# EAGLE board HackmodWear_hexagonSensor (EAGLE 9.1.0)
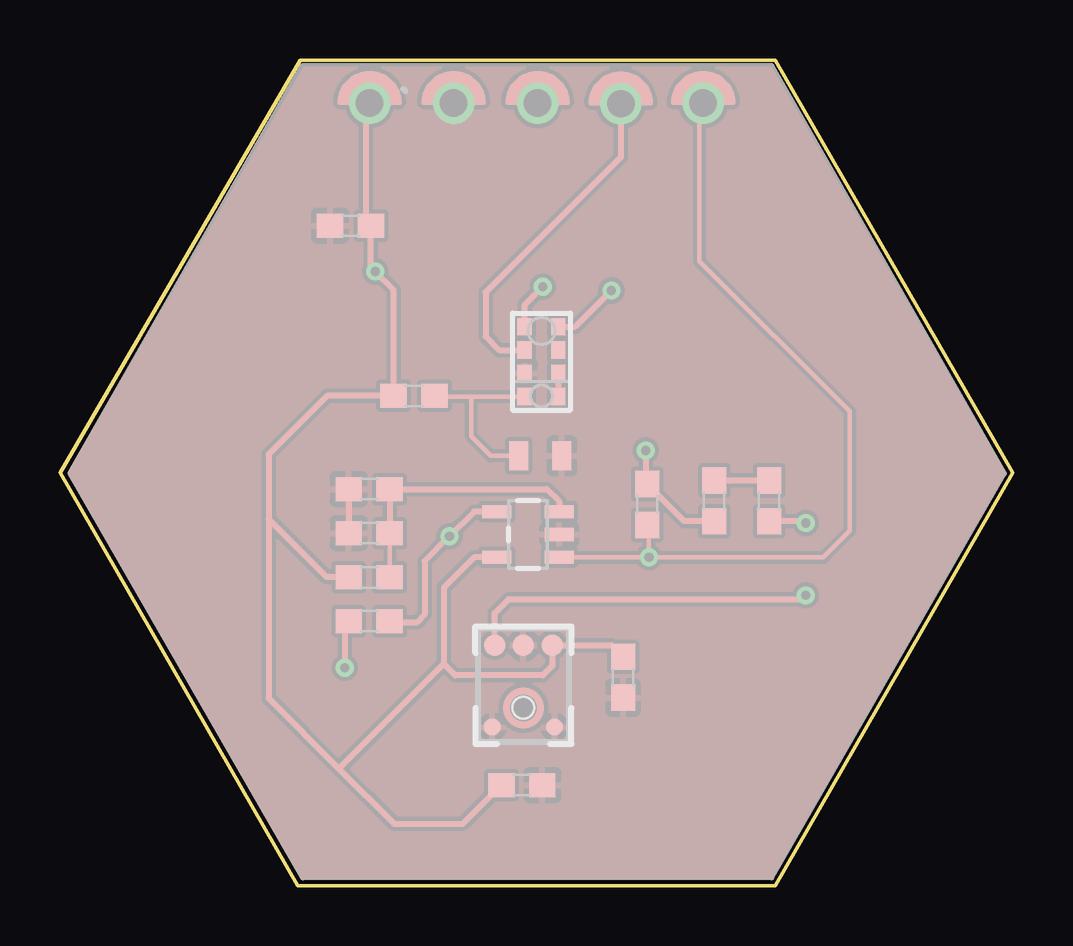
[diagram p0: board, top side]
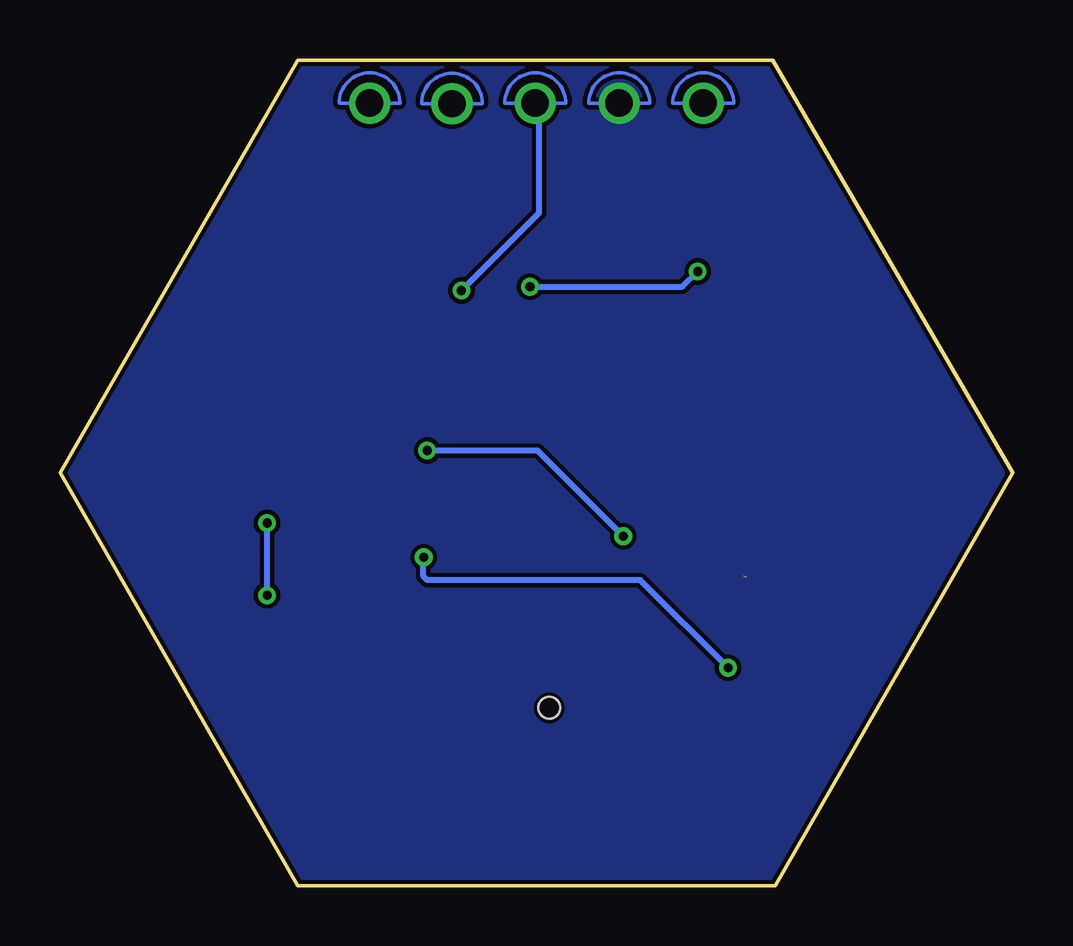
[diagram p1: board, bottom side, seen from below]

Size 39.7 x 34.4 mm. Coordinates in mm from the lower left corner, seen from the top.
Outline: 0,17.2 10,34.4 29.8,34.4 39.7,17.2 29.8,0 9.9,0 0,17.2
Copper layers (1*16): Top 0.035mm / dielectric 1.5mm / Bottom 0.035mm
Design rules "SparkFun-2-layer-TIGHT": minimum track width 7mil, minimum drill 15mil, track to track 7mil, track to pad 7mil, pad to pad 7mil, via to via 7mil, smd to smd 7mil, copper to edge 7mil, drill to drill 7mil, minimum pad ring 7mil, minimum via ring 7mil, stop-mask expansion 4mil, vias tented up to drill 25mil, thermal gap 10mil

## Footprints (pad centres in the part's own frame; a part is rotated, then mirrored left to right if it is on the bottom)
0603 = smd 1.1 x 1: 1 -0.85,0; 2 0.85,0
0805 = smd 0.8 x 1.2: 1 -0.9,0; 2 0.9,0
1X01 = drill 1.143: P$1 0,0
SOT23-5 = smd 0.55 x 1.2: 1 -0.95,-1.3; 2 0,-1.3; 3 0.95,-1.3; 4 0.95,1.3; 5 -0.95,1.3
ADMP401 = smd 0.9 x 0.9: 1 -1.2,2.62; 5 1.2,2.62; 6 0,2.62 | smd 0.7 x 0.7: 2 1.3,-0.8; 4 -1.3,-0.8 | hole 0.9: 0,0
APDS-9960 = smd 0.6 x 0.72: 1 0.7,1.455; 2 0.7,0.485; 3 0.7,-0.485; 4 0.7,-1.455; 5 -0.7,-1.455; 6 -0.7,-0.485; 7 -0.7,0.485; 8 -0.7,1.455

## Placement (x,y rotation side)
C8  0.1uF  [0603]  19.24,4.19 0 top
C13  10uF  [0805]  20.01,17.91 0 top
C15  1.0uF  [0603]  12.11,27.5 180 top
C17  100pF  [0603]  24.46,15.88 270 top
C18  0.1uF  [0603]  23.47,8.68 90 top
C19  4.7uF  [0603]  29.55,16.03 90 top
C20  1.0uF  [0603]  12.88,16.53 180 top
J15  [1X01]  23.37,32.58 0 top
J28  [1X01]  12.9,32.6 0 top
J29  [1X01]  16.4,32.6 0 top
J37  [1X01]  26.8,32.6 0 top
J39  [1X01]  19.9,32.6 0 top
R9  10k  [0603]  12.88,12.85 180 top
R11  10k  [0603]  12.88,14.69 0 top
R12  1.5k  [0603]  27.26,16.03 90 top
R13  100k  [0603]  12.88,11.01 0 top
R29  0  [0603]  14.75,20.41 180 top
U5  OPA344  [SOT23-5]  19.5,14.63 90 top
U6  ADMP401  [ADMP401]  19.31,7.4 0 top
U7  APDS-9960  [APDS-9960]  20.06,21.83 0 top

## Library data of the parts
C8 C18 = SparkFun-Capacitors; PROD_ID: CAP-00810
C13 = SparkFun-Capacitors; PROD_ID: CAP-11330
C15 C20 = SparkFun-Capacitors; PROD_ID: CAP-00868
C17 = SparkFun-Capacitors; PROD_ID: CAP-07883
C19 = SparkFun-Capacitors; PROD_ID: CAP-08280
J15 J28 J29 J37 J39 = SparkFun-Connectors
R9 R11 = SparkFun-Resistors; PROD_ID: RES-00824
R12 = SparkFun-Resistors; PROD_ID: RES-08306
R13 = SparkFun-Resistors; PROD_ID: RES-07828
R29 = SparkFun-Resistors; PROD_ID: RES-08609
U5 = SparkFun
U6 = SparkFun-Sensors; PROD_ID: IC-09773
U7 = SparkFun-Sensors; PROD_ID: SEN-12005

## Nets
3.3V: C8.1 C15.1 C18.2 J28.P$1 R9.2 R29.2 U5.5 U6.5 U7.8
A3: C17.2 J37.P$1 R13.1 U5.1
GND: C8.2 C13.2 C15.2 C18.1 C20.2 J29.P$1 R11.1 U5.2 U6.2 U6.4 U6.6 U7.6
LEDA: C13.1 R29.1 U7.5
N$3: C19.1 U6.1
N$5: U7.3 U7.4
N$6: C17.1 R12.1 R13.2 U5.4
N$10: C19.2 R12.2
N$11: C20.1 R9.1 R11.2 U5.3
SCL: J15.P$1 U7.7
SDA: J39.P$1 U7.1

## Tracks (layer width: path | path; a pad name or v marks a point on that pad's centre or on a via)
3.3V  (via drill 0.38)  (1 unrouted)
  Top 0.178: R29.2
  Top 0.254: U7.8 19.36,24.19 v20.12,24.95 | 8.69,15.27 8.69,17.97 11.13,20.41 R29.2 13.9,24.82 v13.13,25.59 12.96,25.76 C15.1 12.74,27.72 12.74,32.44 J28.P$1 | 8.69,15.27 8.69,7.81 11.62,4.87 | 11.62,4.87 13.93,2.57 16.77,2.57 C8.1 | C18.2 22.98,10.02 U6.5 20.51,9.15 20.12,8.76 16.47,8.76 15.99,9.24 | 17.58,13.68 U5.5 17.26,13.68 15.99,12.41 15.99,9.24 | 11.23,12.89 11.27,12.85 | R9.2 11.11,12.85 8.69,15.27 | 15.99,9.24 11.62,4.87
  Bottom 0.254: v20.12,24.95 13.77,24.95 v13.13,25.59
A3  (via drill 0.38)
  Top 0.178: U5.1 v24.54,13.68 | v24.54,13.68 31.8,13.68 32.9,14.78 32.9,19.76 26.64,26.02 26.64,32.44 J37.P$1 | C17.2 24.54,14.95 v24.54,13.68
  Top 0.254: R13.1 11.86,10.84 v11.86,9.08
  Bottom 0.254: v11.86,9.08 15.51,12.73 24.4,12.73 24.56,12.89 24.56,13.68 v24.54,13.68
GND
  Top 0.254: C20.2 R11.1
  pour Top: 10,34.4 29.8,34.4 39.7,17.2 29.8,0 9.9,0 0,17.2
  pour Bottom: 10,34.4 29.7,34.4 39.7,17.2 29.8,0 10,0 0,17.2
LEDA
  Top 0.178: U7.5 17.14,20.38 | 17.14,20.38 15.63,20.38 R29.1 | C13.1 17.95,17.91 17.14,18.72 17.14,20.38
N$3  (via drill 0.38)
  Top 0.254: U6.1 18.11,11.36 18.69,11.93 31.07,11.93 v31.07,12.09 | v31.07,15.11 31,15.18 C19.1
  Bottom 0.254: v31.07,12.09 v31.07,15.11
N$5
  Top 0.254: U7.3 U7.4
N$6  (via drill 0.38)
  Top 0.254: R13.2 13.76,10.98 14.88,10.98 15.2,11.3 15.2,13.52 v16.23,14.55 17.26,15.58 U5.4 | R12.1 26.01,15.18 C17.1 24.4,16.79 v24.4,18.13
  Bottom 0.254: v16.23,14.55 19.8,18.13 v24.4,18.13
N$10
  Top 0.254: R12.2 C19.2
N$11
  Top 0.178: R11.2 R9.1
  Top 0.254: R11.2 C20.1 20.29,16.53 20.8,16.01 U5.3
SCL
  Top 0.254: U7.7 18.31,22.32 17.74,22.89 17.74,24.73 23.37,30.36 J15.P$1
SDA  (via drill 0.38)
  Top 0.254: U7.1 21.47,23.29 v22.98,24.79
  Bottom 0.254: v22.98,24.79 19.74,28.03 19.74,32.22 | 19.74,32.22 19.9,32.22 J39.P$1 | 19.74,32.22 19.32,32.22

## Text on the board
tPlace: https://creativecommons.org/licenses/by-nc-sa/4.0/legalcode / / This license lets others remix, tweak, and build upon your work / non-commercially, and although their new works must also / acknowledge you and be non-commercial, they don’t have to / license their derivative works on the same terms.